# EAGLE board PCB100_A (EAGLE 9.2.2)
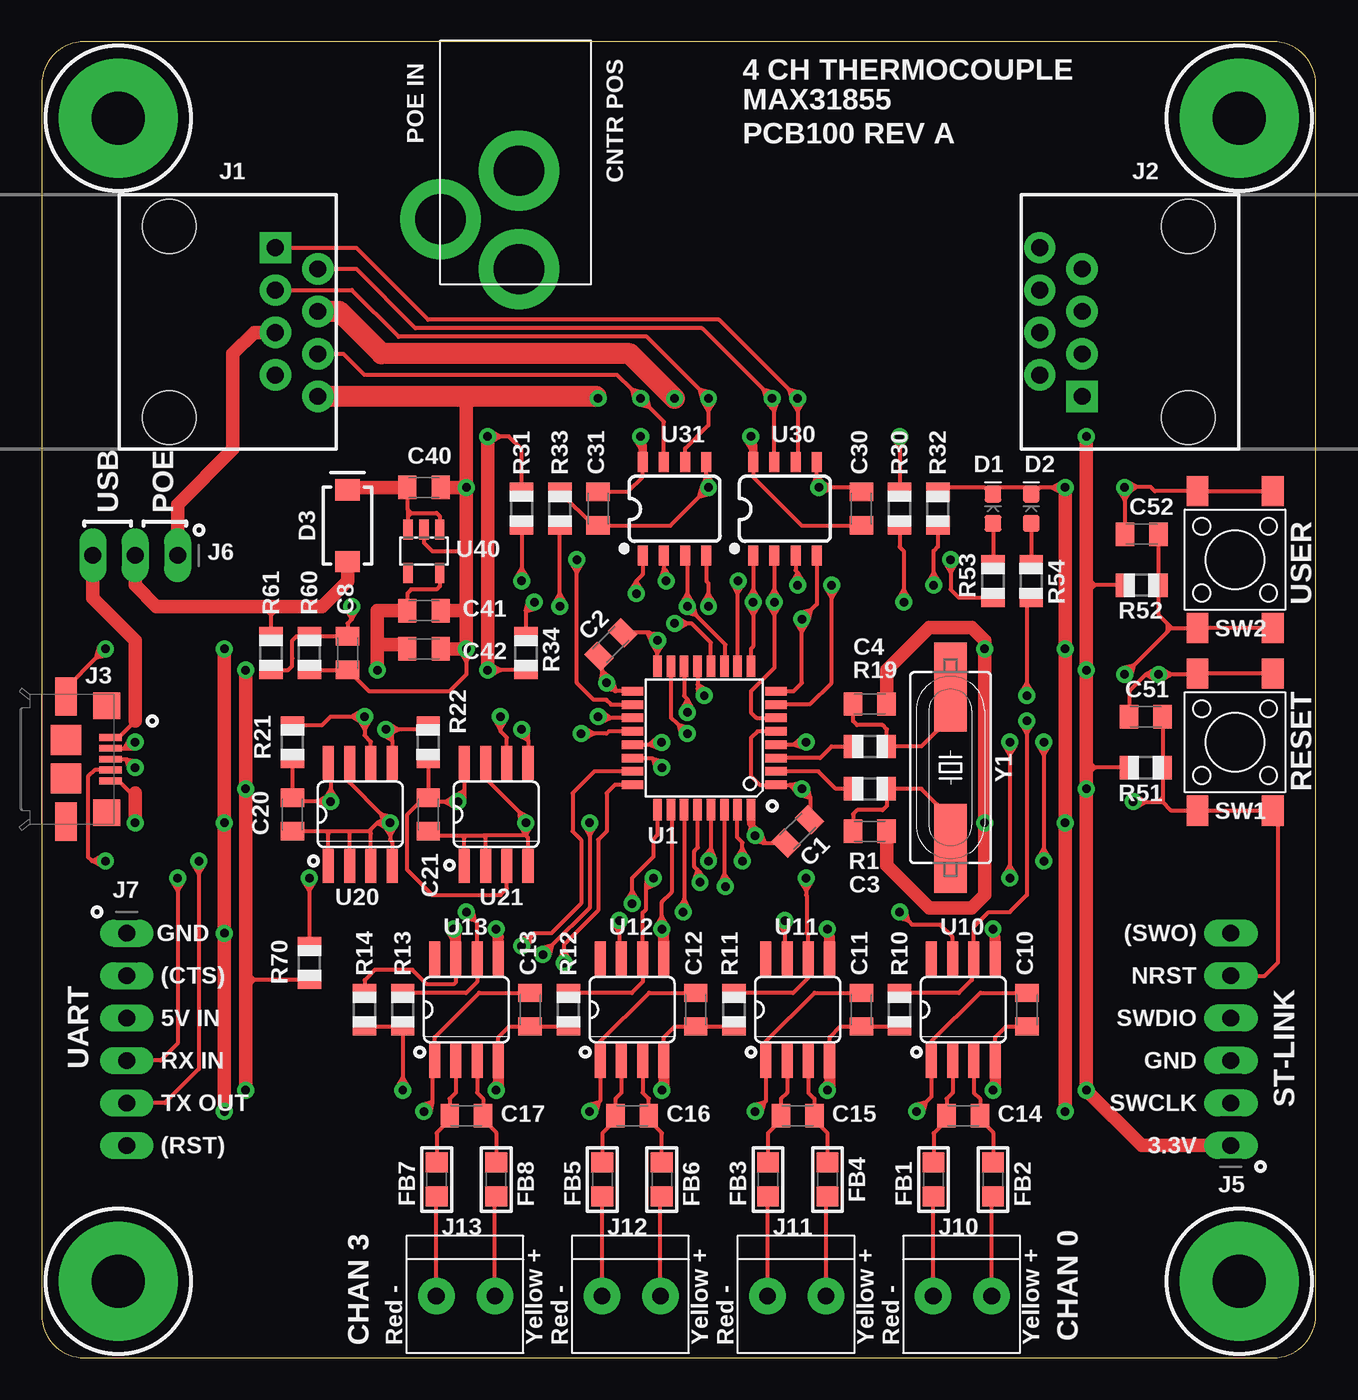
[diagram p0: board, top side]
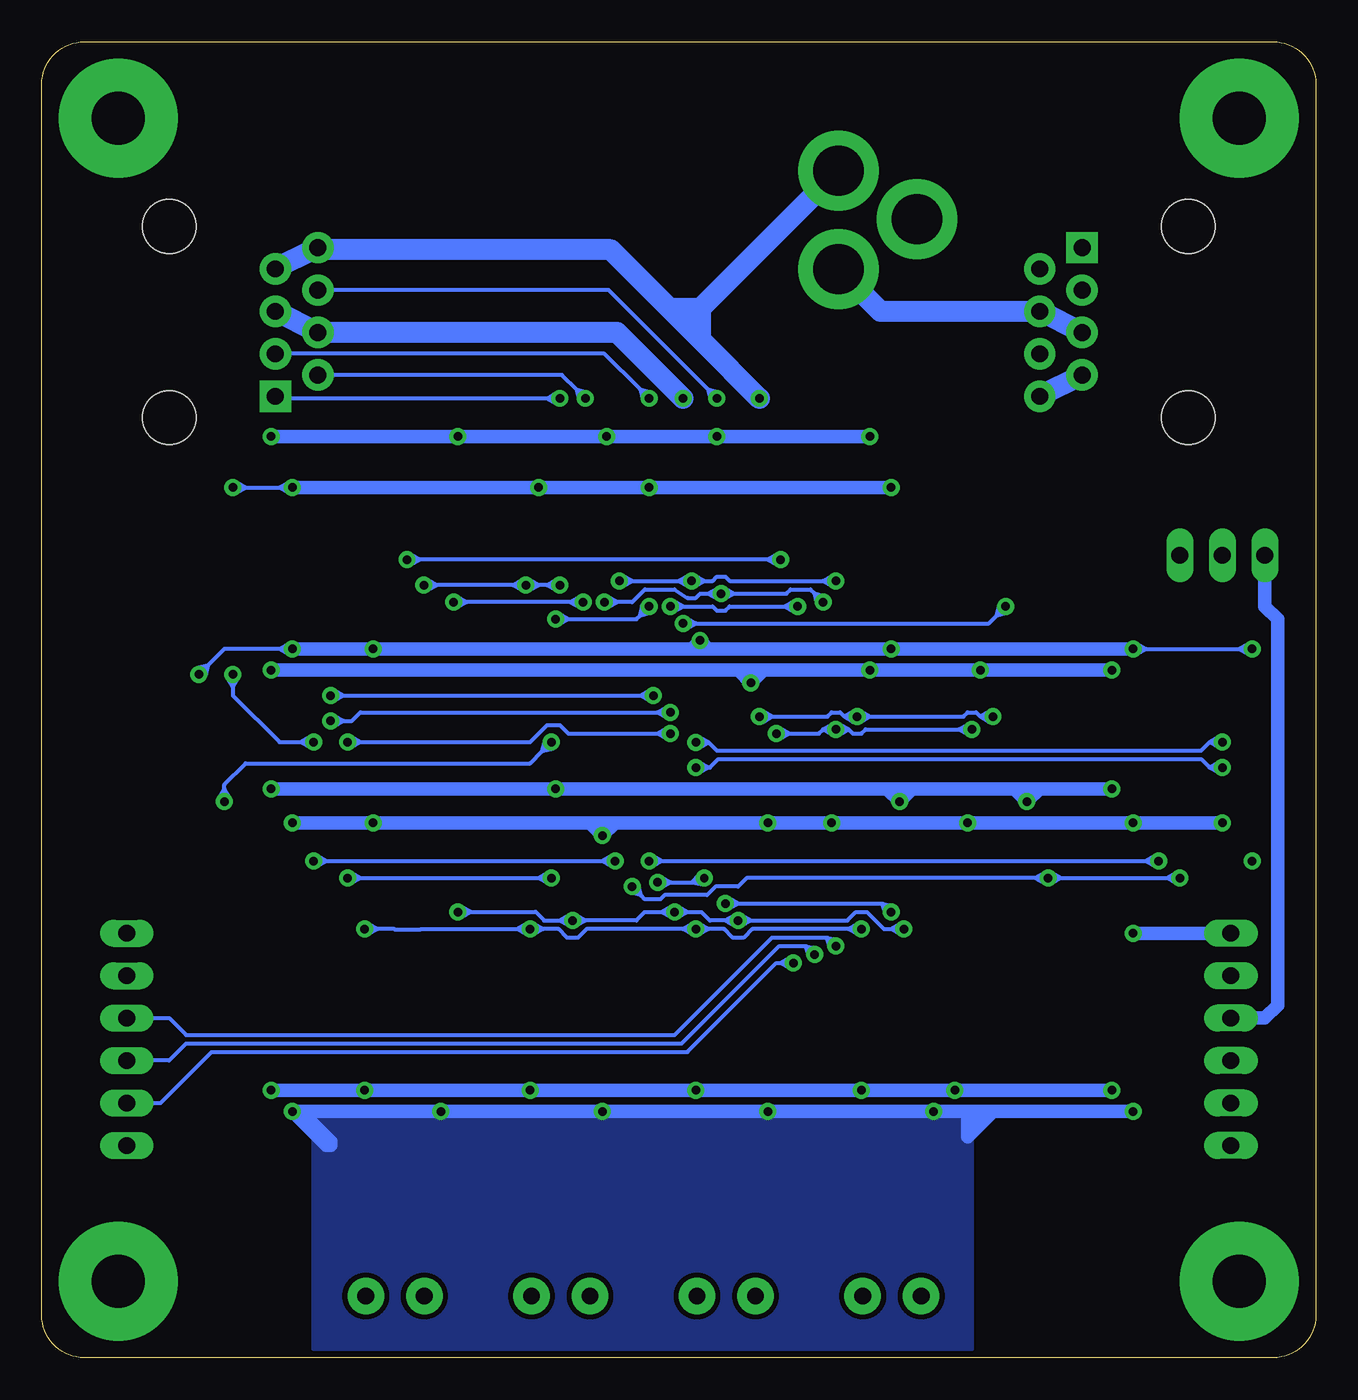
[diagram p1: board, bottom side, seen from below]

Size 76.2 x 78.74 mm. Coordinates in mm from the lower left corner, seen from the top.
Outline: 76.2,76.2 arc90 73.66,78.74 2.54,78.74 arc90 0,76.2 0,2.54 arc90 2.54,0 73.66,0 arc90 76.2,2.54 76.2,76.2
Copper layers (1*16): Top 0.035mm / dielectric 1.5mm / Bottom 0.035mm
Design rules "SparkFun-design-rules": minimum track width 8mil, minimum drill 20mil, track to track 8mil, track to pad 8mil, pad to pad 8mil, via to via 8mil, smd to smd 8mil, copper to edge 10mil, drill to drill 8mil, minimum pad ring 12mil, minimum via ring 10mil, stop-mask expansion 4mil, vias tented up to drill 25mil, thermal gap 10mil
Net classes: 0 default: width 0.203 mm, clearance 0.203 mm; 1 pwr_gnd: width 0.813 mm, clearance 0.254 mm

## Footprints (pad centres in the part's own frame; a part is rotated, then mirrored left to right if it is on the bottom)
C0805K = smd 1.1 x 1.4: 1 -1,0; 2 1,0
LED-0603 = smd 1 x 1: A -0.877,0; C 0.877,0
SMA-DIODE = smd 1.27 x 1.47: A -2.15,0; C 2.15,0
_0805 = smd 1.2 x 1.3: 1 -1.016,0; 2 1.016,0
RJ45-8 = drill 1 pad 1.88 square: 1 -4.445,6.35 | drill 1 pad 1.88: 2 -3.175,8.89; 3 -1.905,6.35; 4 -0.635,8.89; 5 0.635,6.35; 6 1.905,8.89; 7 3.175,6.35; 8 4.445,8.89 | hole 3.2: -5.715,0; 5.715,0
1981584-1 = smd 0.4 x 1.35: 1 -1.3,4.1; 2 -0.65,4.1; 3 0,4.1; 4 0.65,4.1; 5 1.3,4.1 | smd 1.8 x 1.8: M1 -1.15,1.45; M2 1.15,1.45 | smd 2.3 x 1.3: S1 -3.75,1.45; S2 3.75,1.45 | smd 1.6 x 1.6: S3 -3.2,3.885; S4 3.2,3.885
PJ-102A = drill 3 pad 4.8: RING 0.1,-3.39; RING_SW -4.6,-6.29; TIP 0.1,-9.29
1X06_OVAL = drill 1 long: 1 -6.35,0; 2 -3.81,0; 3 -1.27,0; 4 1.27,0; 5 3.81,0; 6 6.35,0
1X03_OVAL = drill 1 long: 1 -2.54,0; 2 0,0; 3 2.54,0
1X2-3.5MM = drill 1 pad 2.184: 1 1.8,0; 2 -1.7,0
MTG_HOLE_C280_H125 = drill 3.175 pad 7.112: 1 0,0
R0805 = smd 1.1 x 1.4: 1 -1,0; 2 1,0
PUSHBUTTON_6X6MM = smd 1.8 x 1.3: 1 -4.1,2.25; 2 4.1,2.25; 3 -4.1,-2.25; 4 4.1,-2.25
TQFP32-0.8MM = smd 1.27 x 0.508: 1 -4.293,2.8; 2 -4.293,2; 3 -4.293,1.2; 4 -4.293,0.4; 5 -4.293,-0.4; 6 -4.293,-1.2; 7 -4.293,-2; 8 -4.293,-2.8; 17 4.293,-2.8; 18 4.293,-2; 19 4.293,-1.2; 20 4.293,-0.4; 21 4.293,0.4; 22 4.293,1.2; 23 4.293,2; 24 4.293,2.8 | smd 0.508 x 1.27: 9 -2.8,-4.293; 10 -2,-4.293; 11 -1.2,-4.293; 12 -0.4,-4.293; 13 0.4,-4.293; 14 1.2,-4.293; 15 2,-4.293; 16 2.8,-4.293; 25 2.8,4.293; 26 2,4.293; 27 1.2,4.293; 28 0.4,4.293; 29 -0.4,4.293; 30 -1.2,4.293; 31 -2,4.293; 32 -2.8,4.293
SO08 = smd 0.66 x 2.032: 1 -1.905,-3.073; 2 -0.635,-3.073; 3 0.635,-3.073; 4 1.905,-3.073; 5 1.905,3.073; 6 0.635,3.073; 7 -0.635,3.073; 8 -1.905,3.073
SO08' = smd 0.6 x 1.2: 1 -1.905,-2.8; 2 -0.635,-2.8; 3 0.635,-2.8; 4 1.905,-2.8; 5 1.905,2.8; 6 0.635,2.8; 7 -0.635,2.8; 8 -1.905,2.8
SOT23-5L = smd 0.55 x 1.2: 1 -0.95,-1.3; 2 0,-1.3; 3 0.95,-1.3; 4 0.95,1.3; 5 -0.95,1.3
HC49UP = smd 5.334 x 1.93: 1 -4.826,0; 2 4.826,0

## Placement (x,y rotation side)
C1  0.1uF  [C0805K]  45.21,31.5 225 top
C2  0.1uF  [C0805K]  34.04,42.67 45 top
C3  10pF  [C0805K]  49.53,31.5 0 top
C4  10pF  [C0805K]  49.53,39.12 0 top
C8  0.1uF  [C0805K]  18.29,42.16 270 top
C10  0.1uF  [C0805K]  58.93,20.83 90 top
C11  0.1uF  [C0805K]  49.02,20.83 90 top
C12  0.1uF  [C0805K]  39.12,20.83 90 top
C13  0.1uF  [C0805K]  29.21,20.83 90 top
C14  0.01uF  [C0805K]  55.12,14.48 0 top
C15  0.01uF  [C0805K]  45.21,14.48 0 top
C16  0.01uF  [C0805K]  35.31,14.48 0 top
C17  0.01uF  [C0805K]  25.4,14.48 0 top
C20  0.1uF  [C0805K]  14.99,32.51 270 top
C21  0.1uF  [C0805K]  23.11,32.51 270 top
C30  0.1uF  [C0805K]  49.02,50.8 90 top
C31  0.1uF  [C0805K]  33.27,50.8 270 top
C40  1uF  [C0805K]  22.86,52.07 0 top
C41  10uF  [C0805K]  22.86,44.7 0 top
C42  10uF  [C0805K]  22.86,42.42 0 top
C51  0.1uF  [C0805K]  66.04,38.35 180 top
C52  0.1uF  [C0805K]  65.79,49.28 180 top
D1  GREEN  [LED-0603]  56.9,50.8 90 top
D2  RED  [LED-0603]  59.18,50.8 90 top
D3  3A/40V/500mV  [SMA-DIODE]  18.29,49.78 90 top
FB1  Ferrite  [_0805]  53.34,10.67 90 top
FB2  Ferrite  [_0805]  56.9,10.67 90 top
FB3  Ferrite  [_0805]  43.43,10.67 90 top
FB4  Ferrite  [_0805]  46.99,10.67 90 top
FB5  Ferrite  [_0805]  33.53,10.67 90 top
FB6  Ferrite  [_0805]  37.08,10.67 90 top
FB7  Ferrite  [_0805]  23.62,10.67 90 top
FB8  Ferrite  [_0805]  27.18,10.67 90 top
J1  RJ45  [RJ45-8]  7.62,61.98 270 top
J2  RJ45  [RJ45-8]  68.58,61.98 90 top
J3  1981584-1  [1981584-1]  0,35.81 270 top
J4  2.1MMJACKTHM  [PJ-102A]  28.45,74.42 0 top
J5  ST-LINK  [1X06_OVAL]  71.12,19.05 90 top
J6  HEADER-1X3  [1X03_OVAL]  5.59,48.01 180 top
J7  UART  [1X06_OVAL]  5.08,19.05 270 top
J10  1X2-3.5MM  [1X2-3.5MM]  55.12,3.68 180 top
J11  1X2-3.5MM  [1X2-3.5MM]  45.21,3.68 180 top
J12  1X2-3.5MM  [1X2-3.5MM]  35.31,3.68 180 top
J13  1X2-3.5MM  [1X2-3.5MM]  25.4,3.68 180 top
MH1  4-40  [MTG_HOLE_C280_H125]  4.57,4.57 0 top
MH2  4-40  [MTG_HOLE_C280_H125]  71.63,4.57 0 top
MH3  4-40  [MTG_HOLE_C280_H125]  4.57,74.17 0 top
MH4  4-40  [MTG_HOLE_C280_H125]  71.63,74.17 0 top
R1  10K  [R0805]  49.53,34.04 180 top
R10  10K  [R0805]  51.31,20.83 90 top
R11  10K  [R0805]  41.4,20.83 90 top
R12  10K  [R0805]  31.5,20.83 90 top
R13  10K  [R0805]  21.59,20.83 90 top
R14  10K  [R0805]  19.3,20.83 90 top
R19  10K  [R0805]  49.53,36.58 180 top
R21  10K  [R0805]  14.99,36.83 90 top
R22  10K  [R0805]  23.11,36.83 90 top
R30  10K  [R0805]  51.31,50.8 270 top
R31  10K  [R0805]  28.7,50.8 270 top
R32  10K  [R0805]  53.59,50.8 90 top
R33  10K  [R0805]  30.99,50.8 90 top
R34  10K  [R0805]  28.96,42.16 90 top
R51  10K  [R0805]  66.04,35.31 0 top
R52  10K  [R0805]  65.79,46.23 0 top
R53  470  [R0805]  56.9,46.48 90 top
R54  470  [R0805]  59.18,46.48 90 top
R60  10K  [R0805]  16,42.16 270 top
R61  10K  [R0805]  13.72,42.16 270 top
R70  10K  [R0805]  16,23.62 90 top
SW1  PUSHBUTTON  [PUSHBUTTON_6X6MM]  71.37,36.83 270 top
SW2  PUSHBUTTON  [PUSHBUTTON_6X6MM]  71.37,47.75 270 top
U1  STM32F042K4  [TQFP32-0.8MM]  39.62,37.08 180 top
U10  MAX31855  [SO08]  55.12,20.83 0 top
U11  MAX31855  [SO08]  45.21,20.83 0 top
U12  MAX31855  [SO08]  35.31,20.83 0 top
U13  MAX31855  [SO08]  25.4,20.83 0 top
U20  EEPROM-I2C  [SO08]  19.05,32.51 0 top
U21  EEPROM-I2C  [SO08]  27.18,32.51 0 top
U30  ST3485  [SO08']  44.45,50.8 0 top
U31  ST3485  [SO08']  37.85,50.8 0 top
U40  LP298XS  [SOT23-5L]  22.86,48.26 180 top
Y1  8MHz  [HC49UP]  54.36,35.31 90 top

## Library data of the parts
C1-C4 C8 C10-C17 C20 C21 C30 C31 C40-C42 C51 C52 J4 R1 R10-R14 R19 R21 R22 R30-R34 R51-R54 R60 R61 R70 U10-U13 U40 = adafruit
D1 = SparkFun-LED; PROD_ID: DIO-00821
D2 = SparkFun-LED; PROD_ID: DIO-00819
D3 = SparkFun-DiscreteSemi; PROD_ID: DIO-09886
FB1-FB8 = microbuilder
J1 J2 = SparkFun-Connectors; PROD_ID: CONN-08506; SF_ID: PRT-00643
J3 = audio amplifier example
J5-J7 J10-J13 MH1-MH4 SW1 SW2 U1 U20 U21 = Thermocouple-board
U30 U31 = SparkFun-IC-Comms; PROD_ID: IC-09388
Y1 = SparkFun-Clocks; PROD_ID: XTAL-11706

## Nets
+3V3: C1.1 C2.1 C10.1 C11.1 C12.1 C13.1 C20.1 C21.1 C30.1 C31.1 C41.1 C42.1 J5.1 R10.1 R11.1 R12.1 R13.1 R14.1 R21.1 R22.1 R30.1 R31.1 R34.1 R51.1 R52.1 R70.1 U1.1 U1.5 U1.17 U10.4 U11.4 U12.4 U13.4 U20.8 U21.3 U21.8 U30.8 U31.8 U40.5
BTN_USER: C52.1 R52.2 SW2.2 SW2.4 U1.31
DN_LINK_A: J1.1 J2.1 U30.6
DN_LINK_B: J1.2 J2.2 U30.7
GND: C1.2 C2.2 C3.2 C4.2 C8.2 C10.2 C11.2 C12.2 C13.2 C20.2 C21.2 C30.2 C31.2 C40.2 C41.2 C42.2 C51.2 C52.2 D1.C D2.C J1.7 J1.8 J2.7 J2.8 J3.5 J3.S1 J4.RING J5.3 J7.1 R32.2 R33.2 R60.2 SW1.1 SW1.3 SW2.1 SW2.3 U1.16 U1.32 U10.1 U11.1 U12.1 U13.1 U20.1 U20.2 U20.3 U20.4 U20.7 U21.1 U21.2 U21.4 U21.7 U30.5 U31.5 U40.2
I2C_SCL: R21.2 U1.19 U20.6 U21.6
I2C_SDA: R22.2 U1.20 U20.5 U21.5
LED_GRN: R53.1 U1.18
LED_RED: R54.1 U1.13
N$1: FB1.1 J10.1
N$2: R1.2 U1.2
N$3: R19.2 U1.3
N$4: C14.1 FB1.2 U10.2
N$5: FB2.1 J10.2
N$6: C14.2 FB2.2 U10.3
N$7: FB3.1 J11.1
N$8: C15.1 FB3.2 U11.2
N$9: FB4.1 J11.2
N$10: C15.2 FB4.2 U11.3
N$11: FB5.1 J12.1
N$12: C16.1 FB5.2 U12.2
N$13: FB6.1 J12.2
N$14: C16.2 FB6.2 U12.3
N$15: FB7.1 J13.1
N$16: C17.1 FB7.2 U13.2
N$17: FB8.1 J13.2
N$18: C17.2 FB8.2 U13.3
N$19: C4.1 R19.1 Y1.2
N$20: C3.1 R1.1 Y1.1
N$21: C40.1 D3.C U40.1 U40.3
N$25: D1.A R53.2
N$26: D2.A R54.2
NRST: C51.1 J5.5 R51.2 SW1.2 SW1.4 U1.4
POE_PWR: J1.4 J1.5 J2.4 J2.5 J4.TIP J6.1
PWR_IN: D3.A J6.2 R61.1
PWR_SENSE: C8.1 R60.1 R61.2 U1.12
SPI_CS0_N: R10.2 U1.14 U10.6
SPI_CS1_N: R11.2 U1.15 U11.6
SPI_CS2_N: R12.2 U1.28 U12.6
SPI_CS3_N: R13.2 U1.25 U13.6
SPI_MISO: R14.2 U1.27 U10.7 U11.7 U12.7 U13.7
SPI_SCK: U1.26 U10.5 U11.5 U12.5 U13.5
SWCLK: J5.2 U1.24
SWDIO: J5.4 U1.23
SWO: J5.6
UART1_RX: J7.4 R70.2 U1.30
UART1_TX: J7.5 U1.29
UART2_DE1: R32.1 U1.7 U30.3
UART2_DE2: R33.1 U1.11 U31.3
UART2_RE1_N: R30.2 U1.6 U30.2
UART2_RE2_N: R31.2 U1.10 U31.2
UART2_RX: R34.2 U1.9 U30.1 U31.1
UART2_TX: U1.8 U30.4 U31.4
UP_LINK_A: J1.3 J2.3 U31.6
UP_LINK_B: J1.6 J2.6 U31.7
USB_DM: J3.2 U1.21
USB_DP: J3.3 U1.22
USB_ID: J3.4
USB_VBUS: J3.1 J6.3 J7.3

## Tracks (layer width: path | path; a pad name or v marks a point on that pad's centre or on a via)
+3V3  (via drill 0.51)
  Top 0.254: v45.47,34.04 45.22,34.28 44.74,34.28 | 37.21,16.75 U12.4 37.21,19.18 37.86,19.83 C12.1 R11.1 | v37.08,16 37.21,16.13 | 47.12,16.75 U11.4 47.12,19.18 47.77,19.83 C11.1 R10.1 | v46.99,16 47.12,16.13 | 57.02,16.75 U10.4 57.02,19.18 57.67,19.83 C10.1 | 57.02,16.13 v56.9,16 | 27.3,16.75 U13.4 27.3,19.18 27.96,19.83 C13.1 R12.1 | v27.18,16 27.3,16.13 | 44.74,34.28 U1.1 42.93,34.28 42.42,34.8 42.42,37.08 42.82,37.48 U1.5 | C31.1 33.29,51.82 35.05,51.82 35.94,52.7 U31.8 | U30.8 42.55,52.7 45.45,49.8 C30.1 | v35.81,55.12 35.81,54.36 | 42.42,54.36 v42.42,55.12 | v51.31,55.12 51.31,54.36 | 51.31,54.36 R30.1 | v33.78,40.39 33.53,40.64 33.53,41.1 | C2.1 33.53,41.77 33.53,41.1 | R14.1 R13.1 21.59,16.76 | 21.59,16.76 v21.59,16 | U21.8 25.27,33.93 | 25.27,33.93 25.27,33.66 | v24.89,33.27 25.27,33.66 | U20.8 17.27,35.46 17.27,34.04 | 17.27,34.04 v17.27,33.27 | 24.13,33.26 24.88,33.26 v24.89,33.27 | 24.13,33.26 23.37,33.26 C21.1 | v17.27,33.27 16.51,33.27 | 16.51,33.27 15.22,33.27 C20.1 R21.1 | C21.1 22.89,33.51 21.84,32.47 21.84,29.21 23.37,27.69 27.43,27.69 27.81,28.07 U21.3 | R22.1 C21.1 | U1.17 34.35,39.88 | 34.35,39.88 34.28,39.88 v33.78,40.39 | 64.77,46.23 R52.1 62.99,46.23 | 62.99,46.23 62.48,46.23 | U40.5 23.81,46.16 23.62,45.97 22.1,45.97 21.86,45.74 C41.1 | 62.99,46.23 62.48,46.74 | 62.99,46.23 62.48,45.72 | v45.47,34.04 45.97,33.53 45.97,33.47 | 45.97,33.47 45.97,32.26 C1.1 | R51.1 62.99,35.31 | 62.99,35.31 62.48,35.31 | R70.1 12.7,22.62 | 12.7,22.62 12.19,22.62 | 62.99,35.31 62.48,35.81 | 62.99,35.31 62.48,34.8 | 27.43,55.12 27.94,55.12 28.7,54.36 R31.1 | 27.43,55.12 v26.67,55.12 | 12.7,22.62 12.19,23.11 | 12.7,22.62 12.19,22.1
  Top 0.254: R34.1 28.94,41.15 27.43,41.15 | 27.43,41.15 v26.67,41.15 | 27.3,16.75 26.88,16.25 v27.18,16 | 27.3,16.75 27.54,16.14 v27.18,16 | 37.21,16.75 36.79,16.25 v37.08,16 | 37.21,16.75 37.44,16.14 v37.08,16 | 47.12,16.75 46.7,16.25 v46.99,16 | 47.12,16.75 47.35,16.14 v46.99,16 | 57.02,16.75 56.6,16.25 v56.9,16 | 57.02,16.75 57.25,16.14 v56.9,16 | 35.81,54.36 35.94,54.58 36.14,54.93 v35.81,55.12 | 35.81,54.36 35.48,54.93 v35.81,55.12 | 42.42,54.36 42.55,54.58 | v42.42,55.12 42.75,54.93 | 42.42,54.36 42.09,54.93 v42.42,55.12 | 51.31,54.36 51.64,54.93 v51.31,55.12 | 51.31,54.36 50.98,54.93 v51.31,55.12 | 44.74,34.28 45.18,33.79 v45.47,34.04 | 44.74,34.28 45.39,34.41 v45.47,34.04 | 45.97,33.47 45.84,34.11 v45.47,34.04 | 45.97,33.47 45.35,33.67 v45.47,34.04 | 33.53,41.1 33.41,40.46 v33.78,40.39 | 33.53,41.1 34.03,40.68 v33.78,40.39 | 34.35,39.88 34.14,40.51 v33.78,40.39 | 34.35,39.88 33.71,40.01 v33.78,40.39 | 21.59,16.76 21.26,16.19 v21.59,16 | 21.59,16.76 21.92,16.19 v21.59,16 | 25.27,33.93 24.7,33.6 v24.89,33.27 | 25.27,33.66 25.27,33.27 v24.89,33.27 | 24.13,33.26 24.71,32.94 v24.89,33.27 | 24.13,33.26 24.7,33.6 v24.89,33.27 | 17.27,34.04 16.94,33.47 v17.27,33.27 | 17.27,34.04 17.6,33.47 v17.27,33.27 | 16.51,33.27 17.08,32.94 v17.27,33.27 | 16.51,33.27 17.08,33.6 v17.27,33.27 | 27.43,55.12 26.86,55.45 v26.67,55.12 | 27.43,55.12 26.86,54.79 v26.67,55.12 | 27.43,41.15 26.86,41.48 v26.67,41.15 | 27.43,41.15 26.86,40.82 v26.67,41.15
  Top 0.508: 35.94,54.58 U31.8 | U30.8 42.55,54.58
  Top 0.66: 37.21,16.75 37.21,16.13 | 47.12,16.75 47.12,16.13 | 57.02,16.75 57.02,16.13 | 27.3,16.75 27.3,16.13
  Top 0.813: v12.19,41.15 v12.19,34.04 12.19,23.11 12.19,22.62 | 12.19,22.61 12.19,22.1 v12.19,16 | v62.48,55.12 62.48,46.74 62.48,46.23 62.48,45.72 v62.48,41.15 62.48,35.81 62.48,35.31 62.48,34.8 v62.48,34.04 v62.48,16 65.79,12.7 J5.1 | v26.67,55.12 v26.67,41.15 | 20.07,42.67 20.07,44.7 C41.1 | 20.07,42.67 v20.07,41.15 | C42.1 21.61,42.67 20.07,42.67
  Bottom 0.813: v26.67,55.12 v35.81,55.12 v42.42,55.12 v51.31,55.12 v62.48,55.12 60.96,55.12 | 33.02,41.15 v26.67,41.15 v20.07,41.15 v12.19,41.15 | 33.02,41.15 v33.78,40.39 34.54,41.15 | v12.19,16 v21.59,16 v27.18,16 v37.08,16 v46.99,16 v56.9,16 v62.48,16 | 24.13,34.04 18.03,34.04 | 18.03,34.04 v17.27,33.27 16.51,34.04 | 24.13,34.04 v24.89,33.27 25.65,34.04 | 34.54,41.15 v62.48,41.15 | 33.02,41.15 34.54,41.15 | v62.48,34.04 v45.47,34.04 25.65,34.04 | v12.19,34.04 16.51,34.04 | 16.51,34.04 18.03,34.04 | 24.13,34.04 25.65,34.04
BTN_USER  (via drill 0.51)
  Top 0.254: SW2.2 SW2.4 67.6,43.65 | C52.1 R52.2 66.79,44.47 67.31,43.94 | v59.94,36.83 59.94,36.07 | 59.94,36.07 59.94,30.48 | 59.94,30.48 v59.94,29.72 | v41.91,29.72 41.91,30.48 | 41.91,30.48 41.91,30.82 41.58,31.15 41.58,32.75 U1.31 | 67.31,43.94 67.6,43.65 | v64.77,40.89 65.31,41.43 | 65.31,41.43 67.31,43.43 | 67.31,43.43 67.53,43.65 67.6,43.65 | 67.31,43.94 67.31,43.43 | 65.31,41.43 64.67,41.26 v64.77,40.89 | 65.31,41.43 65.14,40.8 v64.77,40.89 | 59.94,36.07 60.27,36.64 v59.94,36.83 | 59.94,36.07 59.61,36.64 v59.94,36.83 | 59.94,30.48 59.61,29.91 v59.94,29.72 | 59.94,30.48 60.27,29.91 v59.94,29.72 | 41.91,30.48 41.58,29.91 v41.91,29.72 | 41.91,30.48 42.24,29.91 v41.91,29.72
  Bottom 0.254: v64.77,40.89 64.77,40.13 | 64.77,40.13 64.77,39.62 61.98,36.83 60.71,36.83 | 60.71,36.83 v59.94,36.83 | v59.94,29.72 59.18,29.72 | 59.18,29.72 42.67,29.72 | 42.67,29.72 v41.91,29.72 | 64.77,40.13 65.1,40.7 v64.77,40.89 | 64.77,40.13 64.44,40.7 v64.77,40.89 | 60.71,36.83 60.13,37.16 v59.94,36.83 | 60.71,36.83 60.13,36.5 v59.94,36.83 | 59.18,29.72 59.75,29.39 v59.94,29.72 | 59.18,29.72 59.75,30.05 v59.94,29.72 | 42.67,29.72 42.1,30.05 v41.91,29.72 | 42.67,29.72 42.1,29.39 v41.91,29.72
DN_LINK_A  (via drill 0.51)
  Top 0.254: 45.09,53.7 U30.6 45.21,53.73 45.21,56.64 | J1.1 18.8,66.42 23.11,62.1 40.51,62.1 44.67,57.94 | 44.67,57.94 v45.21,57.4 | v45.21,57.4 45.21,56.64 | 44.67,57.94 44.84,57.3 v45.21,57.4 | 44.67,57.94 45.31,57.77 v45.21,57.4 | 45.21,56.64 45.54,57.21 v45.21,57.4 | 45.21,56.64 44.88,57.21 v45.21,57.4
  Bottom 0.254: v45.21,57.4 45.97,57.4 | 45.97,57.4 62.1,57.4 J2.1 | 45.97,57.4 45.4,57.73 v45.21,57.4 | 45.97,57.4 45.4,57.07 v45.21,57.4
DN_LINK_B  (via drill 0.51)
  Top 0.254: 43.81,53.7 U30.7 43.81,56.65 | J1.2 18.8,65.15 22.35,61.59 39.5,61.59 43.15,57.94 | 43.15,57.94 v43.69,57.4 | 43.81,56.65 43.81,57.28 v43.69,57.4 | 43.15,57.94 43.32,57.3 v43.69,57.4 | 43.15,57.94 43.79,57.77 v43.69,57.4 | 43.81,56.65 44.05,57.27 v43.69,57.4 | 43.81,56.65 43.39,57.16 v43.69,57.4
  Bottom 0.254: J2.2 45.09,58.8 44.23,57.94 | 44.23,57.94 v43.69,57.4 | 44.23,57.94 43.59,57.77 v43.69,57.4 | 44.23,57.94 44.06,57.3 v43.69,57.4
GND  (via drill 0.51)
  Top 0.254: U13.1 23.37,17.63 23.37,15.3 | 23.37,15.3 23.37,15.24 v22.86,14.73 | 33.3,15.27 33.4,15.37 U12.1 33.4,18.92 36.32,21.84 39.1,21.84 C12.2 | 33.3,15.27 v32.77,14.73 | 43.21,15.27 43.31,15.37 U11.1 43.31,18.92 46.23,21.84 46.24,21.83 C11.2 | 43.21,15.27 v42.67,14.73 | 42.8,31.11 v42.67,31.24 | v42.67,31.24 43.12,30.79 C1.2 | 33.15,57.53 v33.27,57.4 | 39.34,51.53 37.59,49.78 33.29,49.78 C31.2 33.26,49.78 33,49.78 R33.2 | 39.34,51.53 v39.88,52.07 | 39.88,53.47 U31.5 39.75,52.83 39.76,52.82 | 46.48,53.47 U30.5 46.35,52.83 46.36,52.82 | C30.2 48.75,52.07 47.24,52.07 | 47.24,52.07 v46.48,52.07 | U1.16 36.82,42.16 | 36.82,42.16 v36.82,42.92 v36.83,42.93 | v36.83,42.93 36.38,43.38 36.22,43.38 | 36.22,43.38 C2.2 | U13.1 23.37,17.88 | U13.1 23.5,19.18 26.16,21.84 26.18,21.83 C13.2 | C10.2 58.91,21.84 56.13,21.84 53.21,18.92 U10.1 53.21,15.62 52.86,15.27 | 52.86,15.27 v52.32,14.73 | v39.88,52.07 39.88,52.7 39.76,52.82 | v46.48,52.07 46.48,52.7 46.36,52.82 | C21.2 23.38,31.24 25.15,31.24 | 25.15,31.24 26.42,31.24 | 15.26,31.24 C20.2 15,31.5 17.02,31.5 | U21.1 25.27,31.11 25.15,31.24 | U21.2 26.54,31.11 26.42,31.24 | U20.7 18.41,34.42 20.29,32.54 | 20.29,32.54 v20.83,32 | U21.7 26.54,34.67 28.56,32.66 | v28.96,32 28.96,32.26 28.56,32.66 | 64.79,52.05 v64.77,52.07 | 65.53,52.11 66.33,52.11 66.58,51.85 SW2.3 SW2.1 | 65.53,52.11 64.81,52.11 v64.77,52.07 | v64.77,52.07 64.77,51.31 | 64.77,51.31 64.77,49.29 C52.2 | v32.77,32 32.77,31.24 | 32.77,31.24 32.77,26.92 30.51,24.67 | 30.51,24.67 v29.97,24.13 | SW1.1 SW1.3 69.09,40.89 67.56,40.89 | v66.8,40.89 66.04,40.89 | 66.04,40.89 65.04,39.89 C51.2 | 67.56,40.89 v66.8,40.89 | C4.2 50.78,39.37
  Top 0.254: U40.2 22.86,48.77 23.37,48.26 25.4,48.26 | J3.5 4.6,34.51 5.33,33.78 5.59,33.78 | 3.26,41.89 3.8,42.42 v3.81,42.42 | 3.26,41.89 1.45,40.07 J3.S1 | 42.42,31.96 42.42,31.49 v42.67,31.24 | U21.4 29.08,31.11 28.96,31.24 | 28.96,31.24 26.42,31.24 | v28.96,32 28.96,31.24 | U20.3 19.68,31.37 | 19.68,31.37 19.56,31.5 | 19.56,31.5 18.29,31.5 | 18.29,31.5 17.02,31.5 | U20.2 18.41,31.37 18.29,31.5 | U20.1 17.14,31.37 17.02,31.5 | v20.83,32 20.83,31.24 | 20.83,31.24 20.83,30.99 20.95,30.86 U20.4 | v20.83,32 20.07,32 | 20.07,32 19.68,31.62 | 19.68,31.62 19.56,31.5 | R32.2 53.86,52.07 56.39,52.07 56.78,51.68 D1.C 57.29,52.07 58.79,52.07 D2.C 59.3,51.68 59.69,52.07 60.45,52.07 | R60.2 C8.2 19.57,39.88 24.38,39.88 25.4,40.89 25.4,41.66 | v25.4,42.42 25.4,41.66 | v61.21,52.07 60.45,52.07 | 19.68,31.37 19.68,31.62 | 23.37,15.3 22.74,15.09 v22.86,14.73 | 23.37,15.3 23.23,14.65 v22.86,14.73 | 33.3,15.27 32.67,15.1 v32.77,14.73 | 33.3,15.27 33.13,14.63 v32.77,14.73 | 43.21,15.27 42.57,15.1 v42.67,14.73 | 43.21,15.27 43.04,14.63 v42.67,14.73 | 52.86,15.27 52.23,15.1 v52.32,14.73 | 52.86,15.27 52.69,14.63 v52.32,14.73 | v42.67,31.24 43.02,31.39 43.28,30.79 42.63,30.86 v42.67,31.24 | 42.42,31.96 42.3,31.32 v42.67,31.24 | 42.42,31.96 42.92,31.53 v42.67,31.24 | 39.34,51.53 39.98,51.7 v39.88,52.07 | 39.34,51.53 39.51,52.17 v39.88,52.07 | 39.76,52.82 39.52,52.21 v39.88,52.07 | 39.76,52.82 40.17,52.31 v39.88,52.07 | 47.24,52.07 46.67,52.4 v46.48,52.07 | 47.24,52.07 46.67,51.74 v46.48,52.07 | 46.36,52.82 46.13,52.21 v46.48,52.07 | 46.36,52.82 46.78,52.31 v46.48,52.07 | 36.82,42.16 37.16,42.73 v36.83,42.93 | 36.82,42.16 36.5,42.74 v36.83,42.93
  Top 0.254: 36.22,43.38 36.48,42.77 v36.83,42.93 | 36.22,43.38 36.87,43.3 v36.83,42.93 | 20.29,32.54 20.46,31.91 v20.83,32 | 20.29,32.54 20.93,32.37 v20.83,32 | 20.83,31.24 21.16,31.81 v20.83,32 | 20.83,31.24 20.5,31.81 v20.83,32 | 20.07,32 20.64,31.67 v20.83,32 | 20.07,32 20.64,32.33 v20.83,32 | 28.56,32.66 28.57,32 v28.96,32 | 28.56,32.66 29.14,32.34 v28.96,32 | 28.96,31.24 29.29,31.81 v28.96,32 | 28.96,31.24 28.63,31.81 v28.96,32 | 65.53,52.11 64.94,52.41 v64.77,52.07 | 65.53,52.11 64.98,51.75 v64.77,52.07 | 64.77,51.31 65.1,51.88 v64.77,52.07 | 64.77,51.31 64.44,51.88 v64.77,52.07 | 32.77,31.24 33.1,31.81 v32.77,32 | 32.77,31.24 32.44,31.81 v32.77,32 | 30.51,24.67 29.87,24.5 v29.97,24.13 | 30.51,24.67 30.34,24.03 v29.97,24.13 | 25.4,41.66 25.73,42.23 v25.4,42.42 | 25.4,41.66 25.07,42.23 v25.4,42.42 | 60.45,52.07 61.02,51.74 v61.21,52.07 | 60.45,52.07 61.02,52.4 v61.21,52.07 | 3.26,41.89 3.9,42.05 v3.81,42.42 | 3.26,41.89 3.44,42.52 v3.81,42.42 | 66.04,40.89 66.61,40.56 v66.8,40.89 | 66.04,40.89 66.61,41.22 v66.8,40.89 | 67.56,40.89 66.99,41.22 v66.8,40.89 | 67.56,40.89 66.99,40.56 v66.8,40.89
  Top 0.508: U1.32 42.42,31.96
  Top 0.813: v10.92,14.73 v10.92,25.4 v10.92,32 v10.92,42.42 | v25.4,52.07 25.4,48.26 25.4,44.7 | 25.4,44.7 v25.4,42.42 C42.2 | C4.2 50.53,41.15 53.07,43.69 55.63,43.69 56.39,42.93 v56.39,42.42 v56.39,32 56.39,27.69 55.63,26.92 53.07,26.92 50.53,29.46 C3.2 | v61.21,52.07 v61.21,42.42 v61.21,32 v61.21,14.73 | 23.88,52.09 C40.2 v25.4,52.07 | 5.59,33.78 v5.59,32 | v25.4,52.07 25.4,57.53 | C41.2 25.4,44.7
  Top 1.27: J1.8 25.4,57.53 33.15,57.53
  Bottom 0.254: J2.8 59.94,66.29 | v64.77,52.07 64.01,52.07 | 64.01,52.07 61.98,52.07 | 61.98,52.07 v61.21,52.07 | J5.3 68.58,17.78 67.56,18.8 37.93,18.8 32.08,24.64 30.54,24.64 | v10.92,42.42 10.16,42.42 | 10.16,42.42 4.57,42.42 | 4.57,42.42 v3.81,42.42 | 30.54,24.64 30.48,24.64 v29.97,24.13 | v61.21,42.42 61.98,42.42 | 61.98,42.42 65.28,42.42 66.26,41.43 | 66.26,41.43 v66.8,40.89 | 10.16,42.42 10.73,42.09 v10.92,42.42 | 10.16,42.42 10.73,42.75 v10.92,42.42 | 64.01,52.07 64.58,51.74 v64.77,52.07 | 64.01,52.07 64.58,52.4 v64.77,52.07 | 30.54,24.64 29.89,24.5 v29.97,24.13 | 30.54,24.64 30.33,24.01 v29.97,24.13 | 61.98,52.07 61.41,52.4 v61.21,52.07 | 61.98,52.07 61.41,51.74 v61.21,52.07 | 61.98,42.42 61.41,42.75 v61.21,42.42 | 61.98,42.42 61.41,42.09 v61.21,42.42 | 4.57,42.42 4,42.75 v3.81,42.42 | 4.57,42.42 4,42.09 v3.81,42.42 | 66.26,41.43 66.43,40.8 v66.8,40.89 | 66.26,41.43 66.9,41.26 v66.8,40.89
  Bottom 0.813: v25.4,52.07 v39.88,52.07 v46.48,52.07 v61.21,52.07 | 36.32,42.42 v25.4,42.42 v10.92,42.42 | 36.32,42.42 v36.83,42.93 37.34,42.42 | 19.3,14.73 v22.86,14.73 v32.77,14.73 v42.67,14.73 v52.32,14.73 v61.21,14.73 59.18,12.7 58.93,12.7 58.93,12.95 60.2,14.22 | 19.3,14.73 v10.92,14.73 | 41.91,32 v42.67,31.24 43.43,32 | 41.91,32 v32.77,32 v28.96,32 | 26.42,32 v28.96,32 | v28.96,32 v20.83,32 v10.92,32 v5.59,32 | v61.21,32 v56.39,32 43.43,32 | 37.34,42.42 v56.39,42.42 v61.21,42.42 | 41.91,32 43.43,32 | 36.32,42.42 37.34,42.42 | 37.22,62.36 38.23,62.36 | v10.92,25.4 J7.1 | 36.7,60.83 36.58,60.95 36.58,63 38.87,63 38.99,63.12 | 19.3,14.73 20.83,13.21 20.83,14.22 20.32,14.22
  Bottom 1.27: J1.7 J1.8 | J2.7 59.94,66.29 42.16,66.29 38.99,63.12 38.23,62.36 36.7,60.83 v33.27,57.4 | J4.RING 36.58,63 37.22,62.36
  pour Bottom (isolate 0.305): 20.57,14.73 20.57,0.51 59.94,0.51 59.94,14.73
I2C_SCL  (via drill 0.51)
  Top 0.254: R21.2 15,37.85 16.76,37.85 17.27,38.35 18.54,38.35 | U1.19 34.03,38.28 | 34.03,38.28 33.34,38.28 v33.27,38.35 | v19.3,38.35 19.3,37.59 | 19.3,37.59 19.3,37.24 19.68,36.85 U20.6 | 18.54,38.35 v19.3,38.35 | v27.43,38.35 27.43,37.59 | 27.43,37.59 27.43,37.49 27.81,37.11 U21.6 | 34.03,38.28 33.49,38.66 v33.27,38.35 | 34.03,38.28 33.43,38.01 v33.27,38.35 | 19.3,37.59 19.63,38.16 v19.3,38.35 | 19.3,37.59 18.97,38.16 v19.3,38.35 | 18.54,38.35 19.11,38.02 v19.3,38.35 | 18.54,38.35 19.11,38.68 v19.3,38.35 | 27.43,37.59 27.76,38.16 v27.43,38.35 | 27.43,37.59 27.1,38.16 v27.43,38.35
  Bottom 0.254: 28.19,38.35 28.45,38.61 28.96,38.61 29.21,38.35 32.51,38.35 | 28.19,38.35 v27.43,38.35 | v33.27,38.35 32.51,38.35 | 20.07,38.35 20.32,38.61 20.83,38.61 21.08,38.35 26.67,38.35 | 20.07,38.35 v19.3,38.35 | v27.43,38.35 26.67,38.35 | 32.51,38.35 33.08,38.02 v33.27,38.35 | 32.51,38.35 33.08,38.68 v33.27,38.35 | 20.07,38.35 19.5,38.68 v19.3,38.35 | 20.07,38.35 19.5,38.02 v19.3,38.35 | 28.19,38.35 27.62,38.68 v27.43,38.35 | 28.19,38.35 27.62,38.02 v27.43,38.35 | 26.67,38.35 27.24,38.02 v27.43,38.35 | 26.67,38.35 27.24,38.68 v27.43,38.35
I2C_SDA  (via drill 0.51)
  Top 0.254: 29.08,36.96 28.7,37.34 v28.7,37.59 | 29.08,36.96 29.08,36.93 | 29.08,36.93 U21.5 | 20.95,36.96 20.57,37.34 v20.57,37.59 | 20.95,36.96 20.95,36.93 | 20.95,36.93 U20.5 | 21.34,37.58 22.86,37.58 R22.2 | 21.34,37.58 20.59,37.58 v20.57,37.59 | U1.20 33.93,37.48 33.78,37.34 33.02,37.34 | 33.02,37.34 v32.26,37.34 | 20.95,36.96 20.95,37.59 v20.57,37.59 | 20.95,36.93 20.38,37.26 v20.57,37.59 | 21.34,37.58 20.77,37.92 v20.57,37.59 | 21.34,37.58 20.76,37.26 v20.57,37.59 | 29.08,36.96 29.08,37.59 v28.7,37.59 | 29.08,36.93 28.51,37.26 v28.7,37.59 | 33.02,37.34 32.45,37.67 v32.26,37.34 | 33.02,37.34 32.45,37.01 v32.26,37.34
  Bottom 0.254: 21.34,37.59 26.92,37.59 27.18,37.34 27.69,37.34 27.94,37.59 | 21.34,37.59 v20.57,37.59 | v28.7,37.59 27.94,37.59 | v32.26,37.34 31.5,37.34 | 31.5,37.34 29.72,37.34 29.46,37.59 | 29.46,37.59 v28.7,37.59 | 21.34,37.59 20.77,37.92 v20.57,37.59 | 21.34,37.59 20.77,37.26 v20.57,37.59 | 27.94,37.59 28.51,37.26 v28.7,37.59 | 27.94,37.59 28.51,37.92 v28.7,37.59 | 29.46,37.59 28.89,37.92 v28.7,37.59 | 29.46,37.59 28.89,37.26 v28.7,37.59 | 31.5,37.34 32.07,37.01 v32.26,37.34 | 31.5,37.34 32.07,37.67 v32.26,37.34
LED_GRN  (via drill 0.51)
  Top 0.254: U1.18 34.06,39.08 33.77,39.37 33.02,39.37 32,40.39 32,46.99 | 32,46.99 v32,47.75 | v54.36,47.75 54.36,46.99 | 54.36,46.99 54.36,45.97 54.86,45.47 54.88,45.48 R53.1 | 32,46.99 32.33,47.56 v32,47.75 | 32,46.99 31.67,47.56 v32,47.75 | 54.36,46.99 54.69,47.56 v54.36,47.75 | 54.36,46.99 54.03,47.56 v54.36,47.75
  Bottom 0.254: v32,47.75 32.77,47.75 | 32.77,47.75 53.59,47.75 | 53.59,47.75 v54.36,47.75 | 32.77,47.75 32.2,48.08 v32,47.75 | 32.77,47.75 32.2,47.42 v32,47.75 | 53.59,47.75 54.16,47.42 v54.36,47.75 | 53.59,47.75 54.16,48.08 v54.36,47.75
LED_RED  (via drill 0.51)
  Top 0.254: U1.13 39.22,40.27 | 39.22,40.27 39.22,40.02 v39.62,39.62 | R54.1 58.93,45.23 58.93,40.39 | 58.93,40.39 v58.93,39.62 | 39.22,40.27 39.24,39.61 v39.62,39.62 | 39.22,40.27 39.8,39.96 v39.62,39.62 | 58.93,40.39 58.6,39.81 v58.93,39.62 | 58.93,40.39 59.26,39.81 v58.93,39.62
  Bottom 0.254: v58.93,39.62 58.17,39.62 | 58.17,39.62 40.39,39.62 | 40.39,39.62 v39.62,39.62 | 40.39,39.62 39.81,39.95 v39.62,39.62 | 40.39,39.62 39.81,39.29 v39.62,39.62 | 58.17,39.62 58.74,39.29 v58.93,39.62 | 58.17,39.62 58.74,39.95 v58.93,39.62
N$1
  Top 0.254: J10.1 53.32,9.63 FB1.1
N$2
  Top 0.254: U1.2 46.45,35.08 47.5,34.04 R1.2
N$3
  Top 0.254: U1.3 46.55,35.88 47.24,36.58 R19.2
N$4
  Top 0.254: FB1.2 53.34,13.44 54.12,14.21 C14.1 54.12,15.49 54.48,15.86 U10.2
N$5
  Top 0.254: J10.2 56.82,9.57 FB2.1
N$6
  Top 0.254: FB2.2 56.9,13.49 56.12,14.27 C14.2 56.12,15.49 55.75,15.86 U10.3
N$7
  Top 0.254: J11.1 43.41,9.63 FB3.1
N$8
  Top 0.254: FB3.2 43.43,13.44 44.21,14.21 C15.1 44.21,15.49 44.58,15.86 U11.2
N$9
  Top 0.254: J11.2 46.91,9.57 FB4.1
N$10
  Top 0.254: U11.3 45.85,15.86 46.21,15.49 C15.2 46.21,14.22 46.99,13.45 FB4.2
N$11
  Top 0.254: J12.1 33.53,3.71 FB5.1
N$12
  Top 0.254: FB5.2 33.53,13.44 34.31,14.21 C16.1 34.31,15.49 34.67,15.86 U12.2
N$13
  Top 0.254: J12.2 37.01,9.57 FB6.1
N$14
  Top 0.254: FB6.2 37.08,13.45 36.31,14.22 C16.2 36.31,15.49 35.94,15.86 U12.3
N$15
  Top 0.254: J13.1 23.6,9.63 FB7.1
N$16
  Top 0.254: U13.2 24.77,15.86 24.4,15.49 C17.1 24.4,14.22 23.62,13.45 FB7.2
N$17
  Top 0.254: J13.2 27.1,9.57 FB8.1
N$18
  Top 0.254: FB8.2 27.18,13.49 26.4,14.27 C17.2 26.4,15.49 26.04,15.86 U13.3
N$19
  Top 0.254: C4.1 48.53,38.08 48.77,37.85 50.29,37.85 50.55,37.59 50.55,36.59 R19.1 52.61,36.58 54.36,38.32 Y1.2
N$20
  Top 0.254: C3.1 48.53,32.53 48.77,32.77 50.29,32.77 50.55,33.02 50.55,34.02 R1.1 52.61,34.04 54.36,32.29 Y1.1
N$21
  Top 0.254: 21.84,52.05 C40.1 21.86,50.78 21.91,50.73 | U40.3 21.91,50.36 | 21.91,50.36 22.1,50.55 | 22.1,50.55 23.62,50.55 23.81,50.36 U40.1 | 21.91,50.73 22.1,50.55 | 21.91,50.36 21.91,50.73 | 18.35,52.07 D3.C
  Top 0.813: 18.35,52.07 C40.1
N$25
  Top 0.254: D1.A R53.2
N$26
  Top 0.254: D2.A R54.2
NRST  (via drill 0.51)
  Top 0.254: U1.4 44.97,36.68 | 44.97,36.68 45.57,36.68 v45.72,36.83 | C51.1 R51.2 67.04,33.53 | 67.04,33.53 67.04,33.25 | v65.28,33.27 65.3,33.25 66.04,33.25 | 66.04,33.25 66.8,33.25 | 66.8,33.25 67.04,33.25 | J5.5 73.15,22.86 73.91,23.62 73.91,32.73 SW1.2 SW1.4 67.56,32.73 67.04,33.25 | 66.8,33.25 66.8,33.29 67.04,33.53 | 44.97,36.68 45.6,36.47 v45.72,36.83 | 44.97,36.68 45.47,37.12 v45.72,36.83 | 66.04,33.25 65.48,33.6 v65.28,33.27 | 66.04,33.25 65.46,32.94 v65.28,33.27
  Bottom 0.254: v65.28,33.27 65.28,34.04 | 65.28,34.04 65.28,34.29 64.01,35.56 46.99,35.56 46.26,36.29 | 46.26,36.29 v45.72,36.83 | 46.26,36.29 46.09,36.93 v45.72,36.83 | 46.26,36.29 45.62,36.46 v45.72,36.83 | 65.28,34.04 64.95,33.47 v65.28,33.27 | 65.28,34.04 65.61,33.47 v65.28,33.27
POE_PWR  (via drill 0.51)
  Top 0.813: J1.5 12.7,61.34 11.43,60.07 11.43,54.36 8.13,51.05 J6.1
  Top 1.27: J1.4 17.78,62.61 20.32,60.07 35.18,60.07 v37.85,57.4
  Bottom 1.27: v37.85,57.4 41.78,61.34 J2.4 J2.5 | J1.5 J1.4 26.04,62.61 J4.TIP
PWR_IN
  Top 0.254: R61.1 13.72,44.45 | 13.72,44.45 13.72,44.96 | 13.72,44.45 14.22,44.96 | 13.72,44.45 13.21,44.96
  Top 0.813: D3.A 18.29,46.48 16.76,44.96 14.22,44.96 13.72,44.96 13.21,44.96 6.86,44.96 5.59,46.23 J6.2
PWR_SENSE  (via drill 0.51)
  Top 0.254: U1.12 40.02,42.78 38.86,43.94 38.61,43.94 | 38.61,43.94 v37.85,43.94 | v18.54,44.96 18.54,44.2 | 18.54,44.2 18.29,43.94 C8.1 R60.1 15.26,43.16 15.24,43.18 14.99,42.93 14.99,41.87 14.97,41.85 14.97,41.39 14.73,41.15 14.72,41.16 R61.2 | 38.61,43.94 38.04,44.27 v37.85,43.94 | 38.61,43.94 38.04,43.61 v37.85,43.94 | 18.54,44.2 18.87,44.77 v18.54,44.96 | 18.54,44.2 18.21,44.77 v18.54,44.96
  Bottom 0.254: v37.85,43.94 37.08,43.94 | 37.08,43.94 19.56,43.94 19.08,44.42 | 19.08,44.42 v18.54,44.96 | 37.08,43.94 37.66,43.61 v37.85,43.94 | 37.08,43.94 37.66,44.27 v37.85,43.94 | 19.08,44.42 18.91,45.06 v18.54,44.96 | 19.08,44.42 18.44,44.59 v18.54,44.96
SPI_CS0_N  (via drill 0.51)
  Top 0.254: 55.63,24.03 U10.6 | U10.6 55.63,23.77 55.63,22.61 54.85,21.83 R10.2 | v58.93,38.1 58.93,37.34 | 58.93,37.34 58.93,27.69 57.91,26.67 56.64,26.67 55.75,25.78 U10.6 | U1.14 38.42,39.6 38.61,39.41 38.61,39.37 | 38.61,39.37 v38.61,38.61 | 58.93,37.34 59.26,37.91 v58.93,38.1 | 58.93,37.34 58.6,37.91 v58.93,38.1 | 38.61,39.37 38.28,38.8 v38.61,38.61 | 38.61,39.37 38.94,38.8 v38.61,38.61
  Bottom 0.254: 39.37,38.61 57.15,38.61 57.66,38.1 58.17,38.1 | 39.37,38.61 v38.61,38.61 | v58.93,38.1 58.17,38.1 | 58.17,38.1 58.74,37.77 v58.93,38.1 | 58.17,38.1 58.74,38.43 v58.93,38.1 | 39.37,38.61 38.8,38.94 v38.61,38.61 | 39.37,38.61 38.8,38.28 v38.61,38.61
SPI_CS1_N  (via drill 0.51)
  Top 0.254: v45.72,28.7 45.72,27.94 | 45.72,27.94 45.72,27.69 45.75,27.66 45.75,25.4 45.85,25.3 U11.6 45.85,22.73 44.94,21.83 R11.2 | U1.15 37.62,38.32 38.07,37.88 | v38.61,37.34 38.07,37.88 | v57.91,36.83 57.91,36.07 | 57.91,36.07 57.91,29.46 | 57.91,29.46 v57.91,28.7 | 45.72,27.94 46.05,28.51 v45.72,28.7 | 45.72,27.94 45.39,28.51 v45.72,28.7 | 38.07,37.88 38.24,37.24 v38.61,37.34 | 38.07,37.88 38.71,37.71 v38.61,37.34 | 57.91,29.46 57.58,28.89 v57.91,28.7 | 57.91,29.46 58.24,28.89 v57.91,28.7 | 57.91,36.07 58.24,36.64 v57.91,36.83 | 57.91,36.07 57.58,36.64 v57.91,36.83
  Bottom 0.254: v57.91,28.7 57.15,28.7 | 57.15,28.7 46.48,28.7 | 46.48,28.7 45.97,28.7 45.85,28.57 v45.72,28.7 | 39.37,37.34 44.7,37.34 45.21,37.85 45.97,37.85 46.99,36.83 57.15,36.83 | 39.37,37.34 v38.61,37.34 | v57.91,36.83 57.15,36.83 | 46.48,28.7 45.91,29.03 v45.72,28.7 | 46.48,28.7 45.91,28.37 v45.72,28.7 | 39.37,37.34 38.8,37.67 v38.61,37.34 | 39.37,37.34 38.8,37.01 v38.61,37.34 | 57.15,28.7 57.72,28.37 v57.91,28.7 | 57.15,28.7 57.72,29.03 v57.91,28.7 | 57.15,36.83 57.72,36.5 v57.91,36.83 | 57.15,36.83 57.72,37.16 v57.91,36.83
SPI_CS2_N  (via drill 0.51)
  Top 0.254: U12.6 35.81,23.77 | U12.6 35.94,23.88 | 35.94,23.88 35.94,22.48 35.29,21.83 R12.2 | 35.81,24 35.94,23.88 | U12.6 35.94,26.63 36.14,26.83 36.14,28.07 | 36.14,28.07 36.14,28.27 v36.58,28.7 | U1.28 39.24,32.77 39.24,30.52 39.04,30.32 39.04,29.37 39.22,29.19 | v39.37,28.45 39.37,29.04 39.22,29.19 | 36.14,28.07 36.74,28.36 v36.58,28.7 | 36.14,28.07 36.2,28.73 v36.58,28.7 | 39.22,29.19 39.01,28.57 v39.37,28.45 | 39.22,29.19 39.66,28.7 v39.37,28.45
  Bottom 0.254: v39.37,28.45 38.61,28.45 | 38.61,28.45 37.29,28.45 | 37.29,28.45 36.83,28.45 v36.58,28.7 | 37.29,28.45 36.87,28.95 v36.58,28.7 | 37.29,28.45 36.65,28.33 v36.58,28.7 | 38.61,28.45 39.18,28.12 v39.37,28.45 | 38.61,28.45 39.18,28.78 v39.37,28.45
SPI_CS3_N  (via drill 0.51)
  Top 0.254: U13.6 25.91,23.77 | U13.6 26.04,22.48 25.38,21.83 R13.2 | v35.31,27.18 35.31,27.94 | 35.31,27.94 35.31,28.7 36.58,29.97 36.58,31.02 36.82,31.27 U1.25 | v25.4,26.67 25.94,26.13 | 25.94,26.13 26.04,26.04 U13.6 | 35.31,27.94 34.98,27.37 v35.31,27.18 | 35.31,27.94 35.64,27.37 v35.31,27.18 | 25.94,26.13 25.77,26.77 v25.4,26.67 | 25.94,26.13 25.3,26.3 v25.4,26.67
  Bottom 0.254: v35.31,27.18 34.54,27.18 | 34.54,27.18 25.97,27.18 | 25.97,27.18 25.91,27.18 v25.4,26.67 | 34.54,27.18 35.12,26.85 v35.31,27.18 | 34.54,27.18 35.12,27.51 v35.31,27.18 | 25.97,27.18 25.32,27.04 v25.4,26.67 | 25.97,27.18 25.76,26.55 v25.4,26.67
SPI_MISO  (via drill 0.51)
  Top 0.254: v24.64,25.65 24.64,25.55 24.77,25.43 | v34.54,26.16 34.54,25.4 | 34.54,25.4 34.54,24.03 U12.7 | v44.45,26.16 44.45,25.4 | 44.45,25.4 44.45,24.03 U11.7 | v51.31,26.67 51.85,26.13 | 51.85,26.13 52.07,25.91 53.75,25.91 54.48,25.17 U10.7 | 24.64,23.77 U13.7 24.77,22.48 24.64,22.35 23.04,22.35 22.17,23.22 19.93,23.22 19.3,22.59 R14.2 | U1.27 38.42,27.43 | 38.42,27.43 38.42,26.67 v38.35,26.67 | v24.64,25.65 24.97,25.46 24.64,24.89 24.31,25.46 v24.64,25.65 | 34.54,25.4 34.87,25.97 v34.54,26.16 | 34.54,25.4 34.21,25.97 v34.54,26.16 | 44.45,25.4 44.78,25.97 v44.45,26.16 | 44.45,25.4 44.12,25.97 v44.45,26.16 | 51.85,26.13 51.68,26.77 v51.31,26.67 | 51.85,26.13 51.21,26.3 v51.31,26.67 | 38.42,27.43 38.04,26.89 v38.35,26.67 | 38.42,27.43 38.7,26.83 v38.35,26.67
  Top 0.66: U13.7 24.77,25.43
  Bottom 0.254: v51.31,26.67 51.3,26.68 50.55,26.68 | 50.55,26.68 46.67,26.68 46.15,26.16 45.21,26.16 | 45.21,26.16 v44.45,26.16 | v34.54,26.16 35.31,26.16 | 35.31,26.16 36.24,26.16 36.75,26.67 37.59,26.67 | v34.54,26.16 33.78,26.16 | 33.78,26.16 28.02,26.16 27.51,26.67 26.84,26.67 25.83,25.65 25.4,25.65 | 25.4,25.65 v24.64,25.65 | v38.35,26.67 37.59,26.67 | 39.12,26.67 40.13,26.67 40.64,26.16 43.69,26.16 | 39.12,26.67 v38.35,26.67 | 43.69,26.16 v44.45,26.16 | 25.4,25.65 24.83,25.98 v24.64,25.65 | 25.4,25.65 24.83,25.32 v24.64,25.65 | 35.31,26.16 34.73,26.49 v34.54,26.16 | 35.31,26.16 34.73,25.83 v34.54,26.16 | 33.78,26.16 34.35,25.83 v34.54,26.16 | 33.78,26.16 34.35,26.49 v34.54,26.16 | 45.21,26.16 44.64,26.49 v44.45,26.16 | 45.21,26.16 44.64,25.83 v44.45,26.16 | 43.69,26.16 44.26,25.83 v44.45,26.16 | 43.69,26.16 44.26,26.49 v44.45,26.16 | 50.55,26.68 51.11,26.34 v51.31,26.67 | 50.55,26.68 51.12,27 v51.31,26.67 | 37.59,26.67 38.16,26.34 v38.35,26.67 | 37.59,26.67 38.16,27 v38.35,26.67 | 39.12,26.67 38.55,27 v38.35,26.67 | 39.12,26.67 38.55,26.34 v38.35,26.67
SPI_SCK  (via drill 0.51)
  Top 0.254: v27.18,25.65 27.18,25.3 27.3,25.17 | U13.5 27.3,24.9 | v37.08,25.65 37.08,25.55 37.21,25.43 | U12.5 37.21,24.9 | v46.99,25.65 46.99,25.3 47.12,25.17 | U11.5 47.12,24.9 | v56.9,25.65 56.9,25.3 57.02,25.17 | U10.5 57.02,24.9 | v37.08,25.65 37.08,26.42 | 37.08,26.42 37.08,27.26 37.67,27.85 37.67,32.75 U1.26 | 27.3,24.9 27.54,25.52 v27.18,25.65 | 27.3,24.9 26.88,25.41 v27.18,25.65 | 37.21,24.9 37.44,25.52 v37.08,25.65 | 37.21,24.9 36.79,25.41 v37.08,25.65 | 37.08,26.42 36.75,25.84 v37.08,25.65 | 37.08,26.42 37.41,25.84 v37.08,25.65 | 47.12,24.9 47.35,25.52 v46.99,25.65 | 47.12,24.9 46.7,25.41 v46.99,25.65 | 57.02,24.9 57.25,25.52 v56.9,25.65 | 57.02,24.9 56.6,25.41 v56.9,25.65
  Top 0.66: 27.3,24.9 27.3,25.17 | 37.21,24.9 37.21,25.43 | 47.12,24.9 47.12,25.17 | 57.02,24.9 57.02,25.17
  Bottom 0.254: v27.18,25.65 27.94,25.65 | 27.94,25.65 33.7,25.65 34.22,25.13 34.87,25.13 35.39,25.65 36.32,25.65 | 36.32,25.65 v37.08,25.65 | v37.08,25.65 37.85,25.65 | 37.85,25.65 43.61,25.65 44.13,25.13 44.77,25.13 45.29,25.65 46.23,25.65 | 46.23,25.65 v46.99,25.65 | 47.75,25.65 53.51,25.65 53.53,25.64 55.1,25.64 55.12,25.65 56.13,25.65 | 47.75,25.65 v46.99,25.65 | 56.13,25.65 v56.9,25.65 | 27.94,25.65 27.37,25.98 v27.18,25.65 | 27.94,25.65 27.37,25.32 v27.18,25.65 | 36.32,25.65 36.89,25.32 v37.08,25.65 | 36.32,25.65 36.89,25.98 v37.08,25.65 | 37.85,25.65 37.27,25.98 v37.08,25.65 | 37.85,25.65 37.27,25.32 v37.08,25.65 | 46.23,25.65 46.8,25.32 v46.99,25.65 | 46.23,25.65 46.8,25.98 v46.99,25.65 | 47.75,25.65 47.18,25.98 v46.99,25.65 | 47.75,25.65 47.18,25.32 v46.99,25.65 | 56.13,25.65 56.7,25.32 v56.9,25.65 | 56.13,25.65 56.7,25.98 v56.9,25.65
SWCLK  (via drill 0.51)
  Top 0.254: U1.24 34.3,34.28 34.29,34.29 33.78,33.78 33.78,31.5 33.27,30.99 33.27,26.75 31.24,24.72 31.24,24.38 | v31.24,23.62 31.24,24.38 | 31.24,24.38 30.91,23.81 v31.24,23.62 | 31.24,24.38 31.57,23.81 v31.24,23.62
  Bottom 0.254: J5.2 69.09,15.24 66.04,18.29 37.59,18.29 32.26,23.62 32,23.62 | 32,23.62 v31.24,23.62 | 32,23.62 31.43,23.95 v31.24,23.62 | 32,23.62 31.43,23.29 v31.24,23.62
SWDIO  (via drill 0.51)
  Top 0.254: 35.3,35.05 U1.23 33.05,35.08 31.75,33.78 31.75,31.5 32.26,30.99 32.26,27.18 30.48,25.4 29.46,25.4 29.24,25.18 | 29.24,25.18 v28.7,24.64 | 29.24,25.18 28.6,25.01 v28.7,24.64 | 29.24,25.18 29.07,24.54 v28.7,24.64
  Bottom 0.254: J5.4 68.58,20.32 67.56,19.3 38.35,19.3 32.51,25.15 29.27,25.15 | 29.27,25.15 29.21,25.15 v28.7,24.64 | 29.27,25.15 28.62,25.01 v28.7,24.64 | 29.27,25.15 29.06,24.52 v28.7,24.64
UART1_RX  (via drill 0.51)
  Top 0.254: U1.30 40.82,28.95 | 40.82,28.95 40.82,28.26 v40.89,28.19 | J7.4 7.11,17.78 8.13,18.8 8.13,27.94 | v8.13,28.7 8.13,27.94 | v16,28.7 16,27.94 | 16,27.94 R70.2 | 40.82,28.95 40.55,28.35 v40.89,28.19 | 40.82,28.95 41.2,28.41 v40.89,28.19 | 8.13,27.94 8.46,28.51 v8.13,28.7 | 8.13,27.94 7.8,28.51 v8.13,28.7 | 16,27.94 16.33,28.51 v16,28.7 | 16,27.94 15.67,28.51 v16,28.7
  Bottom 0.254: v16,28.7 16.76,28.7 | 16.76,28.7 34.04,28.7 34.54,28.19 35.9,28.19 36.41,27.69 38.95,27.69 39.2,27.43 40.13,27.43 40.35,27.66 | v16,28.7 15.24,28.7 | 15.24,28.7 8.89,28.7 | 8.89,28.7 v8.13,28.7 | 40.35,27.66 v40.89,28.19 | 40.35,27.66 40.99,27.83 v40.89,28.19 | 40.35,27.66 40.53,28.29 v40.89,28.19 | 8.89,28.7 8.32,29.03 v8.13,28.7 | 8.89,28.7 8.32,28.37 v8.13,28.7 | 16.76,28.7 16.19,29.03 v16,28.7 | 16.76,28.7 16.19,28.37 v16,28.7 | 15.24,28.7 15.81,28.37 v16,28.7 | 15.24,28.7 15.81,29.03 v16,28.7
UART1_TX  (via drill 0.51)
  Top 0.254: U1.29 40.02,30.47 | 40.02,30.47 40.02,29.86 v39.88,29.72 | J7.5 7.37,15.24 9.4,17.27 9.4,28.96 | v9.4,29.72 9.4,28.96 | 40.02,30.47 39.59,29.97 v39.88,29.72 | 40.02,30.47 40.24,29.84 v39.88,29.72 | 9.4,28.96 9.73,29.53 v9.4,29.72 | 9.4,28.96 9.07,29.53 v9.4,29.72
  Bottom 0.254: v39.88,29.72 39.12,29.72 | 39.12,29.72 10.16,29.72 | 10.16,29.72 v9.4,29.72 | 39.12,29.72 39.69,29.39 v39.88,29.72 | 39.12,29.72 39.69,30.05 v39.88,29.72 | 10.16,29.72 9.59,30.05 v9.4,29.72 | 10.16,29.72 9.59,29.39 v9.4,29.72
UART2_DE1  (via drill 0.51)
  Top 0.254: 43.95,39.05 U1.7 43.95,39.12 45.97,39.12 47.24,40.39 47.24,45.47 | 47.24,45.47 v47.24,46.23 | U30.3 45.09,47.12 45.21,46.99 | 45.21,46.99 v45.21,46.23 | v53.34,46.23 53.34,46.99 | 53.34,46.99 53.34,48.28 53.59,48.53 R32.1 | 45.21,46.99 44.88,46.42 v45.21,46.23 | 45.21,46.99 45.54,46.42 v45.21,46.23 | 47.24,45.47 47.57,46.04 v47.24,46.23 | 47.24,45.47 46.91,46.04 v47.24,46.23 | 53.34,46.99 53.01,46.42 v53.34,46.23 | 53.34,46.99 53.67,46.42 v53.34,46.23
  Bottom 0.254: v45.21,46.23 45.97,46.23 | 45.97,46.23 46.48,46.23 | 46.48,46.23 v47.24,46.23 | v47.24,46.23 48.01,46.23 | 48.01,46.23 52.58,46.23 | 52.58,46.23 v53.34,46.23 | 45.97,46.23 45.4,46.56 v45.21,46.23 | 45.97,46.23 45.4,45.9 v45.21,46.23 | 46.48,46.23 47.05,45.9 v47.24,46.23 | 46.48,46.23 47.05,46.56 v47.24,46.23 | 48.01,46.23 47.44,46.56 v47.24,46.23 | 48.01,46.23 47.44,45.9 v47.24,46.23 | 52.58,46.23 53.15,45.9 v53.34,46.23 | 52.58,46.23 53.15,46.56 v53.34,46.23
UART2_DE2  (via drill 0.51)
  Top 0.254: U1.11 40.89,41.45 40.89,42.67 39.15,44.42 | 39.15,44.42 v38.61,44.96 | U31.3 38.61,47.87 38.61,45.72 | 38.61,45.72 v38.61,44.96 | v30.99,44.96 30.99,45.72 | 30.99,45.72 R33.1 | 39.15,44.42 38.98,45.06 v38.61,44.96 | 39.15,44.42 38.51,44.59 v38.61,44.96 | 38.61,45.72 38.28,45.15 v38.61,44.96 | 38.61,45.72 38.94,45.15 v38.61,44.96 | 30.99,45.72 30.66,45.15 v30.99,44.96 | 30.99,45.72 31.32,45.15 v30.99,44.96
  Bottom 0.254: 31.75,44.96 35.05,44.96 35.31,44.7 35.81,44.7 36.07,44.96 37.85,44.96 | 31.75,44.96 v30.99,44.96 | v38.61,44.96 37.85,44.96 | 37.85,44.96 38.42,44.63 v38.61,44.96 | 37.85,44.96 38.42,45.29 v38.61,44.96 | 31.75,44.96 31.18,45.29 v30.99,44.96 | 31.75,44.96 31.18,44.63 v30.99,44.96
UART2_RE1_N  (via drill 0.51)
  Top 0.254: U1.6 42.74,38.28 42.42,38.61 42.42,39.88 43.81,41.27 43.81,44.45 | U30.2 43.81,45.97 | 43.81,45.97 v43.81,45.21 | v43.81,45.21 43.81,44.45 | R30.2 51.31,48.51 51.56,48.26 51.56,45.97 | 51.56,45.97 v51.56,45.21 | 43.81,45.97 43.48,45.4 v43.81,45.21 | 43.81,45.97 44.15,45.4 v43.81,45.21 | 43.81,44.45 44.15,45.02 v43.81,45.21 | 43.81,44.45 43.48,45.02 v43.81,45.21 | 51.56,45.97 51.23,45.4 v51.56,45.21 | 51.56,45.97 51.89,45.4 v51.56,45.21
  Bottom 0.254: v43.81,45.21 44.58,45.21 | 44.58,45.21 50.8,45.21 | 50.8,45.21 v51.56,45.21 | 44.58,45.21 44.01,45.54 v43.81,45.21 | 44.58,45.21 44.01,44.88 v43.81,45.21 | 50.8,45.21 51.37,44.88 v51.56,45.21 | 50.8,45.21 51.37,45.54 v51.56,45.21
UART2_RE2_N  (via drill 0.51)
  Top 0.254: U1.10 41.62,45.72 | 41.62,45.72 41.62,46.45 v41.66,46.48 | R31.2 28.7,47.24 | 28.7,47.24 v28.7,46.48 | 37.22,47.23 37.34,47.11 v37.34,46.48 | 37.22,47.23 37.21,47.24 U31.2 | 41.62,45.72 41.98,46.28 v41.66,46.48 | 41.62,45.72 41.32,46.31 v41.66,46.48 | 28.7,47.24 28.37,46.67 v28.7,46.48 | 28.7,47.24 29.03,46.67 v28.7,46.48 | 37.22,47.23 36.98,46.62 v37.34,46.48 | 37.22,47.23 37.63,46.72 v37.34,46.48
  Bottom 0.254: v41.66,46.48 40.89,46.48 | 40.89,46.48 38.1,46.48 | 38.1,46.48 v37.34,46.48 | 29.46,46.48 35.05,46.48 35.31,46.74 35.81,46.74 36.07,46.48 36.58,46.48 | 29.46,46.48 v28.7,46.48 | v37.34,46.48 36.58,46.48 | 40.89,46.48 41.47,46.15 v41.66,46.48 | 40.89,46.48 41.47,46.81 v41.66,46.48 | 29.46,46.48 28.89,46.81 v28.7,46.48 | 29.46,46.48 28.89,46.15 v28.7,46.48 | 38.1,46.48 37.53,46.81 v37.34,46.48 | 38.1,46.48 37.53,46.15 v37.34,46.48 | 36.58,46.48 37.15,46.15 v37.34,46.48 | 36.58,46.48 37.15,46.81 v37.34,46.48
UART2_RX  (via drill 0.51)
  Top 0.254: U30.1 42.55,45.97 | 42.55,45.97 v42.55,45.21 | v42.55,45.21 42.55,44.45 | 42.55,44.45 42.55,42.55 42.42,42.42 U1.9 | 36.07,48.13 U31.1 35.94,46.86 35.56,46.48 | v35.56,45.72 35.56,46.48 | v29.46,45.21 28.96,44.7 28.96,44.64 | 28.96,44.64 R34.2 | 42.55,45.97 42.22,45.4 v42.55,45.21 | 42.55,45.97 42.88,45.4 v42.55,45.21 | 42.55,44.45 42.88,45.02 v42.55,45.21 | 42.55,44.45 42.22,45.02 v42.55,45.21 | 35.56,46.48 35.23,45.91 v35.56,45.72 | 35.56,46.48 35.89,45.91 v35.56,45.72 | 28.96,44.64 29.58,44.85 v29.46,45.21 | 28.96,44.64 29.09,45.29 v29.46,45.21
  Bottom 0.254: 41.78,45.21 40.89,45.21 40.13,45.97 38.35,45.97 37.59,45.47 37.08,45.47 36.83,45.72 36.32,45.72 | 41.78,45.21 v42.55,45.21 | 36.32,45.72 v35.56,45.72 | v35.56,45.72 34.8,45.72 | 34.8,45.72 31.66,45.72 31.41,45.97 30.23,45.97 30,45.75 | 30,45.75 v29.46,45.21 | 41.78,45.21 42.35,44.88 v42.55,45.21 | 41.78,45.21 42.35,45.54 v42.55,45.21 | 36.32,45.72 35.75,46.05 v35.56,45.72 | 36.32,45.72 35.75,45.39 v35.56,45.72 | 34.8,45.72 35.37,45.39 v35.56,45.72 | 34.8,45.72 35.37,46.05 v35.56,45.72 | 30,45.75 29.36,45.58 v29.46,45.21 | 30,45.75 29.83,45.11 v29.46,45.21
UART2_TX  (via drill 0.51)
  Top 0.254: U1.8 44.95,39.88 44.96,39.88 45.47,40.39 45.47,43.43 | U31.4 39.75,46.48 39.88,46.35 39.88,45.72 | 39.88,45.72 v39.88,44.96 | 45.47,43.43 v45.47,44.2 | U30.4 46.35,45.09 46.01,44.73 | 46.01,44.73 v45.47,44.2 | 45.47,43.43 45.8,44.01 v45.47,44.2 | 45.47,43.43 45.14,44.01 v45.47,44.2 | 46.01,44.73 45.37,44.56 v45.47,44.2 | 46.01,44.73 45.83,44.1 v45.47,44.2 | 39.88,45.72 39.55,45.15 v39.88,44.96 | 39.88,45.72 40.21,45.15 v39.88,44.96
  Bottom 0.254: v45.47,44.2 44.7,44.2 | 44.7,44.2 40.64,44.2 40.42,44.42 | 40.42,44.42 v39.88,44.96 | 44.7,44.2 45.27,43.87 v45.47,44.2 | 44.7,44.2 45.27,44.53 v45.47,44.2 | 40.42,44.42 40.25,45.06 v39.88,44.96 | 40.42,44.42 39.78,44.59 v39.88,44.96
UP_LINK_A  (via drill 0.51)
  Top 0.254: J1.3 18.54,63.88 21.34,61.09 36.2,61.09 39.34,57.94 | 39.34,57.94 v39.88,57.4 | U31.6 38.48,54.4 39.88,55.8 39.88,56.64 | v39.88,57.4 39.88,56.64 | 39.34,57.94 39.51,57.3 v39.88,57.4 | 39.34,57.94 39.98,57.77 v39.88,57.4 | 39.88,56.64 40.21,57.21 v39.88,57.4 | 39.88,56.64 39.55,57.21 v39.88,57.4
  Bottom 0.254: v39.88,57.4 40.42,57.94 | 40.42,57.94 42.55,60.07 J2.3 | 40.42,57.94 39.78,57.77 v39.88,57.4 | 40.42,57.94 40.25,57.3 v39.88,57.4
UP_LINK_B  (via drill 0.51)
  Top 0.254: J1.6 18.03,60.07 19.3,58.8 34.42,58.8 35.27,57.94 | v35.81,57.4 35.27,57.94 | U31.7 37.21,56.01 36.35,56.87 | 36.35,56.87 v35.81,57.4 | 35.27,57.94 35.45,57.3 v35.81,57.4 | 35.27,57.94 35.91,57.77 v35.81,57.4 | 36.35,56.87 36.18,57.5 v35.81,57.4 | 36.35,56.87 35.72,57.04 v35.81,57.4
  Bottom 0.254: v35.81,57.4 36.35,57.94 | 36.35,57.94 42.29,63.88 J2.6 | 36.35,57.94 35.72,57.77 v35.81,57.4 | 36.35,57.94 36.18,57.3 v35.81,57.4
USB_DM  (via drill 0.51)
  Top 0.254: J3.2 4.92,36.46 | 4.92,36.46 5.22,36.46 v5.59,36.83 | U1.21 36.32,36.68 | 36.32,36.68 36.94,36.68 v37.07,36.82 | 4.92,36.46 5.58,36.45 v5.59,36.83 | 4.92,36.46 5.26,37.03 v5.59,36.83 | 36.32,36.68 36.95,36.46 v37.07,36.82 | 36.32,36.68 36.83,37.11 v37.07,36.82
  Bottom 0.254: v37.07,36.82 36.31,36.82 | 36.31,36.82 35.81,36.32 6.86,36.32 6.35,36.83 | v5.59,36.83 6.35,36.83 | 6.35,36.83 5.78,37.16 v5.59,36.83 | 6.35,36.83 5.78,36.5 v5.59,36.83 | 36.31,36.82 36.88,36.49 v37.07,36.82 | 36.31,36.82 36.88,37.15 v37.07,36.82
USB_DP  (via drill 0.51)
  Top 0.254: J3.3 5.02,35.81 | 5.02,35.81 5.08,35.81 v5.59,35.31 | U1.22 36.51,35.88 36.55,35.84 | 36.55,35.84 v37.08,35.31 | 5.02,35.81 5.23,35.19 v5.59,35.31 | 5.02,35.81 5.67,35.68 v5.59,35.31 | 36.55,35.84 36.72,35.21 v37.08,35.31 | 36.55,35.84 37.18,35.67 v37.08,35.31
  Bottom 0.254: 6.35,35.31 6.86,35.81 35.73,35.81 36.23,35.31 36.32,35.31 | v5.59,35.31 6.35,35.31 | 36.32,35.31 v37.08,35.31 | 6.35,35.31 5.78,35.64 v5.59,35.31 | 6.35,35.31 5.78,34.98 v5.59,35.31 | 36.32,35.31 36.89,34.98 v37.08,35.31 | 36.32,35.31 36.89,35.64 v37.08,35.31
USB_ID  (via drill 0.51)
  Top 0.254: J3.4 3.15,35.16 2.75,34.77 2.75,29.97 3.01,29.72 3.05,29.72 | 3.05,29.72 v3.81,29.72 | 3.05,29.72 3.62,29.39 v3.81,29.72 | 3.05,29.72 3.62,30.05 v3.81,29.72
USB_VBUS
  Top 0.254: J3.1 4.6,37.11 5.59,38.1
  Top 0.813: 5.59,38.1 5.59,42.93 3.05,45.47 J6.3
  Bottom 0.813: J6.3 3.05,44.96 2.29,44.2 2.29,21.08 3.05,20.32 J7.3

## Text on the board
tPlace: Red - | Yellow + | Red - | Yellow + | Red - | Yellow + | Red - | Yellow +
tNames: CNTR POS | POE IN | 4 CH THERMOCOUPLE | MAX31855 | PCB100 REV A | USB | POE | USER | RESET | (SWO) | GND | NRST | (CTS) | SWDIO | 5V IN | GND | UART | RX IN | SWCLK | TX OUT | ST-LINK | 3.3V | (RST) | CHAN 3 | CHAN 0